# EAGLE board pcb_New (EAGLE 9.6.2)
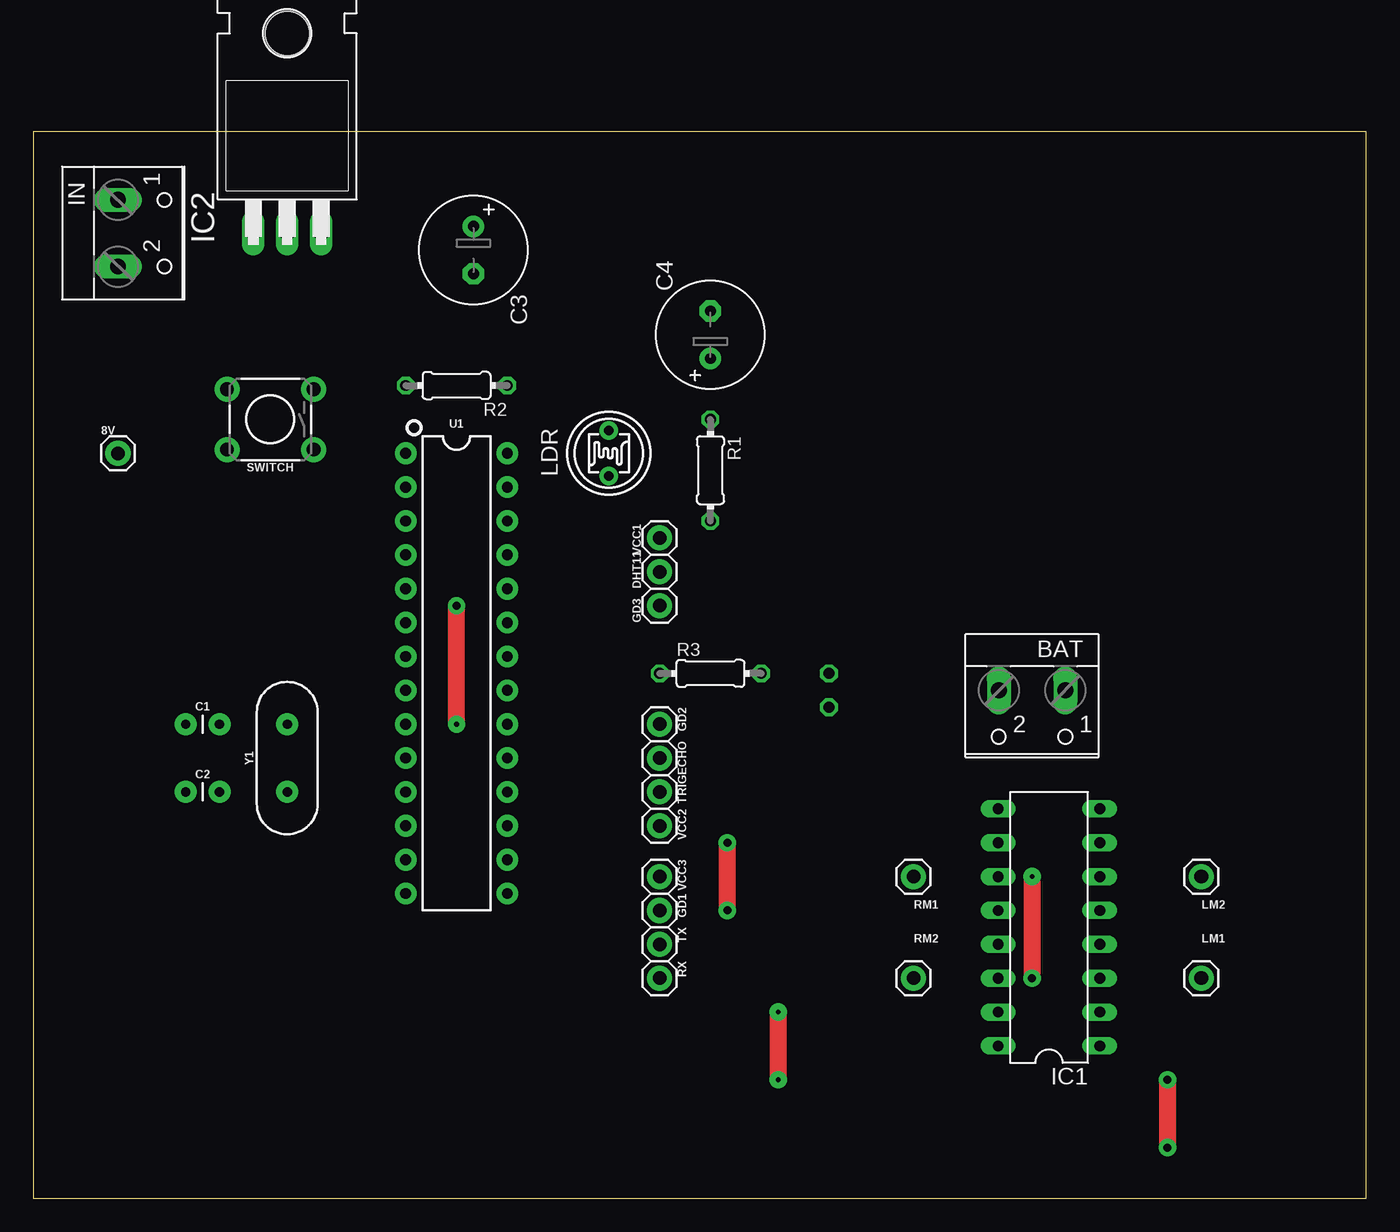
[diagram p0: board, top side]
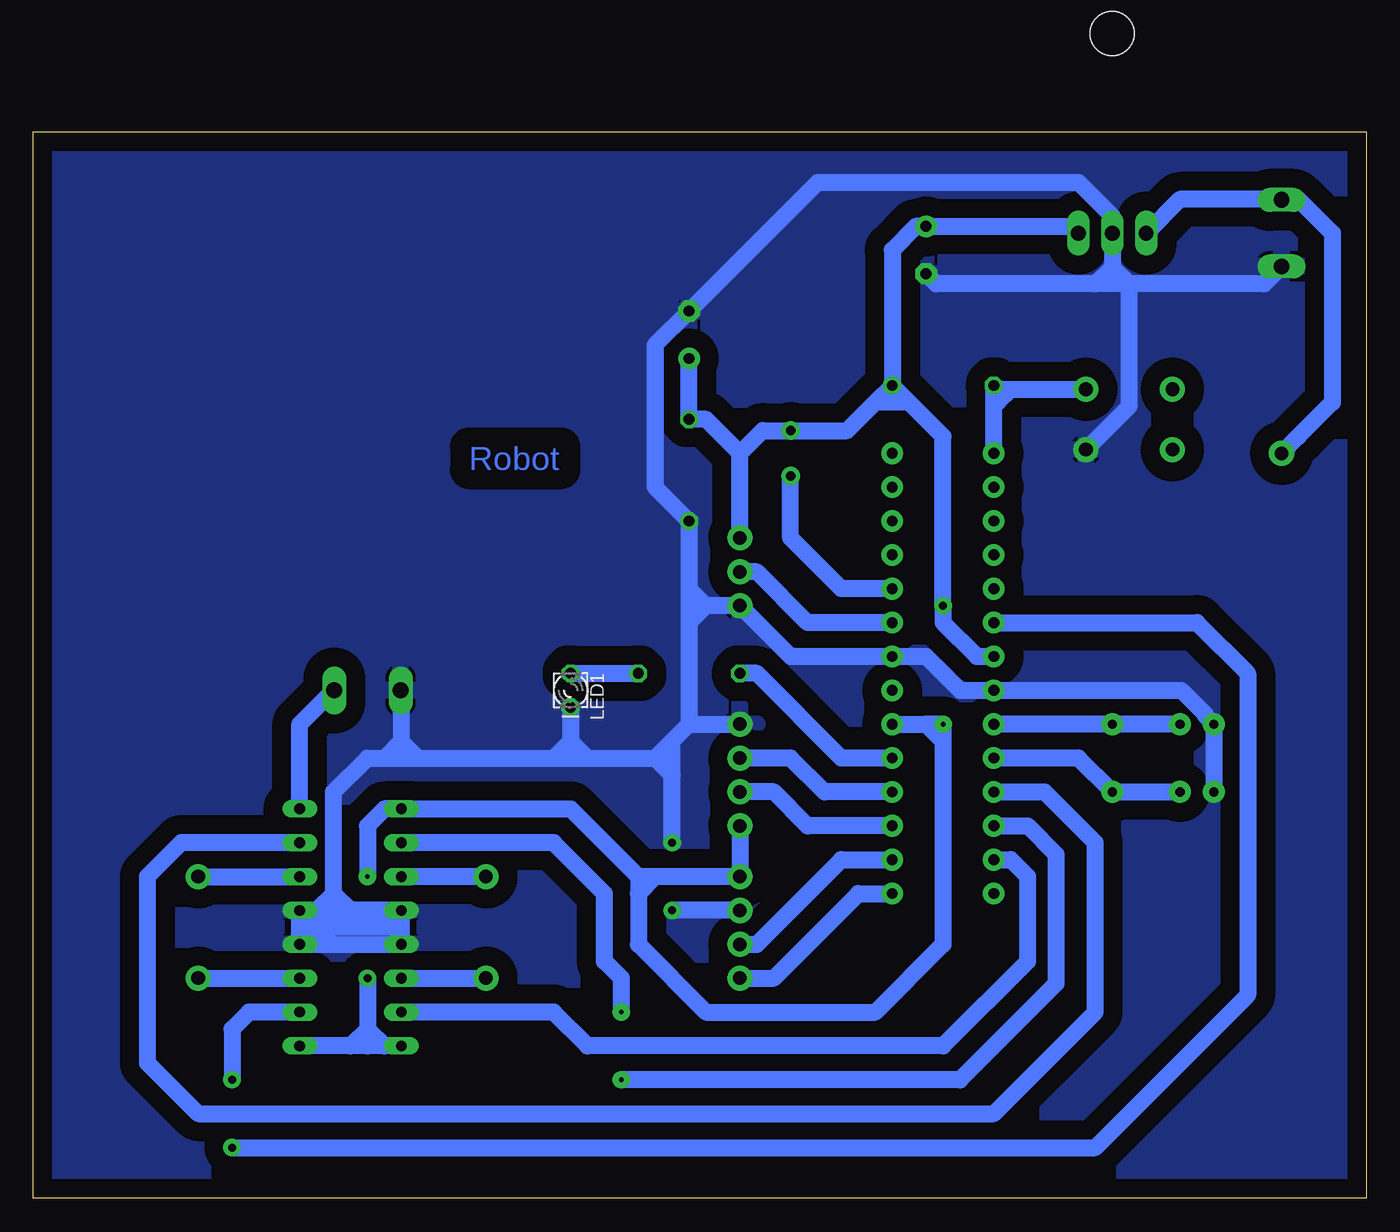
[diagram p1: board, bottom side, seen from below]

Size 100 x 80 mm. Coordinates in mm from the lower left corner, seen from the top.
Outline: 0,0 100,0 100,80 0,80 0,0
Copper layers (1*16): Top 0.035mm / dielectric 0.15mm / Bottom 0.035mm
Design rules "default *": minimum track width 6mil, minimum drill 0.35mm, track to track 16mil, track to pad 16mil, pad to pad 16mil, via to via 16mil, smd to smd 16mil, copper to edge 40mil, drill to drill 6mil, minimum pad ring 10mil, minimum via ring 8mil, stop-mask expansion 4mil, vias tented up to drill 0mil, thermal gap 10mil

## Footprints (pad centres in the part's own frame; a part is rotated, then mirrored left to right if it is on the bottom)
1X01 = drill 1.016 pad 1.88: 1 0,0
W237-102 = drill 1.194 long: 1 -2.5,-1.27; 2 2.5,-1.27
CAP-PTH-2.54 = drill 0.7 pad 1.651: 1 -1.27,0; 2 1.27,0
E3,5-8 = drill 0.813 pad 1.6: + -1.778,0 | drill 0.813 pad 1.6 octagon: - 1.778,0
DIL16 = drill 0.813 long: 1 -8.89,-3.81; 2 -6.35,-3.81; 3 -3.81,-3.81; 4 -1.27,-3.81; 5 1.27,-3.81; 6 3.81,-3.81; 7 6.35,-3.81; 8 8.89,-3.81; 9 8.89,3.81; 10 6.35,3.81; 11 3.81,3.81; 12 1.27,3.81; 13 -1.27,3.81; 14 -3.81,3.81; 15 -6.35,3.81; 16 -8.89,3.81
TO220H = drill 1.118 long: 1 -2.54,-10.16; 2 0,-10.16; 3 2.54,-10.16 | hole 3.302: 0,4.826
T0-46-A10XX = drill 0.7 pad 1.4: 1 -1.7,0; 2 1.7,0
LED_LD260 = drill 0.813 octagon: A -1.27,0; K 1.27,0
0204/7 = drill 0.813 octagon: 1 -3.81,0; 2 3.81,0
TACTILE_SWITCH_PTH_6.0MM = drill 1.016 pad 1.88: 1 -3.251,2.261; 2 3.251,2.261; 3 -3.251,-2.261; 4 3.251,-2.261
DIP28 = drill 0.813 pad 1.626: 1 -16.51,-3.81; 2 -13.97,-3.81; 3 -11.43,-3.81; 4 -8.89,-3.81; 5 -6.35,-3.81; 6 -3.81,-3.81; 7 -1.27,-3.81; 8 1.27,-3.81; 9 3.81,-3.81; 10 6.35,-3.81; 11 8.89,-3.81; 12 11.43,-3.81; 13 13.97,-3.81; 14 16.51,-3.81; 15 16.51,3.81; 16 13.97,3.81; 17 11.43,3.81; 18 8.89,3.81; 19 6.35,3.81; 20 3.81,3.81; 21 1.27,3.81; 22 -1.27,3.81; 23 -3.81,3.81; 24 -6.35,3.81; 25 -8.89,3.81; 26 -11.43,3.81; 27 -13.97,3.81; 28 -16.51,3.81
HC49US = drill 0.7 pad 1.651: 1 -2.54,0; 2 2.54,0

## Placement (x,y rotation side)
8V  8v  [1X01]  6.35,55.88 0 top
BAT  [W237-102]  74.93,36.83 180 top
C1  22pF  [CAP-PTH-2.54]  12.7,35.56 0 top
C2  22pF  [CAP-PTH-2.54]  12.7,30.48 0 top
C3  1000uf  [E3,5-8]  33.02,71.12 270 top
C4  [E3,5-8]  50.8,64.77 90 top
DHT11  DHT11  [1X01]  46.99,46.99 90 top
ECHO  [1X01]  46.99,33.02 270 top
GD1  [1X01]  46.99,21.59 270 top
GD2  [1X01]  46.99,35.56 270 top
GD3  [1X01]  46.99,44.45 90 top
IC1  L293D  [DIL16]  76.2,20.32 90 top
IC2  7805T  [TO220H]  19.05,82.55 0 top
IN  [W237-102]  7.62,72.39 270 top
LDR  A1050_09  [T0-46-A10XX]  43.18,55.88 270 top
LED1  [LED_LD260]  59.69,38.1 270 bottom
LM1  [1X01]  87.63,16.51 0 top
LM2  [1X01]  87.63,24.13 0 top
R1  10k  [0204/7]  50.8,54.61 270 top
R2  10K  [0204/7]  31.75,60.96 180 top
R3  330  [0204/7]  50.8,39.37 0 top
RM1  [1X01]  66.04,24.13 0 top
RM2  [1X01]  66.04,16.51 0 top
RX  [1X01]  46.99,16.51 270 top
SWITCH  Reset  [TACTILE_SWITCH_PTH_6.0MM]  17.78,58.42 180 top
TRIG  [1X01]  46.99,30.48 270 top
TX  [1X01]  46.99,19.05 270 top
U1  328P  [DIP28]  31.75,39.37 270 top
VCC1  [1X01]  46.99,49.53 90 top
VCC2  [1X01]  46.99,27.94 270 top
VCC3  [1X01]  46.99,24.13 270 top
Y1  16MHz  [HC49US]  19.05,33.02 90 top

## Library data of the parts
8V DHT11 ECHO GD1-GD3 LM1 LM2 RM1 RM2 RX TRIG TX VCC1-VCC3 = SparkFun-Connectors
BAT IN = con-wago-500; MPN: 237-102; OC_FARNELL: unknown; OC_NEWARK: 70K9898
C1 C2 = SparkFun-Capacitors; PROD_ID: CAP-09128
C3 C4 = BeagleBone_Blue_R3
IC1 = st-microelectronics; MPN: L293D; OC_FARNELL: 9589619; OC_NEWARK: 56P8249
IC2 = linear
LDR = photo-elements
LED1 = eagle-ltspice; SPICEMODEL: NONE; SPICEPREFIX: D; SPICETYPE: diode
R1-R3 = rcl; SPICEPREFIX: R
SWITCH = SparkFun-Switches; PROD_ID: SWCH-08441; SF_SKU: COM-00097
U1 = SparkFun-IC-Microcontroller; PROD_ID: IC-09136
Y1 = SparkFun-Clocks; PROD_ID: XTAL-08181; SF_ID: COM-00536

## Nets
GND: BAT.2 C1.1 C2.1 C3.- C4.- GD1.1 GD2.1 GD3.1 IC1.4 IC1.5 IC1.12 IC1.13 IC2.2 IN.2 LED1.K R1.2 SWITCH.1 U1.8 U1.22
N$1: C1.2 U1.9 Y1.2
N$2: C2.2 U1.10 Y1.1
N$3: RX.1 U1.15
N$4: R2.2 SWITCH.3 U1.1
N$5: TX.1 U1.16
N$6: ECHO.1 U1.18
N$7: TRIG.1 U1.17
N$8: LDR.2 U1.24
N$9: DHT11.1 U1.23
N$10: LED1.A R3.2
N$11: R3.1 U1.19
N$12: IC1.2 U1.6
N$13: BAT.1 IC1.8
N$14: IC1.6 LM2.1
N$15: 8V.1 IC2.1 IN.1
N$16: IC1.3 LM1.1
N$17: IC1.14 RM2.1
N$18: IC1.7 U1.11
N$19: IC1.11 RM1.1
N$21: IC1.10 U1.12
N$23: IC1.15 U1.13
VCC: C3.+ C4.+ IC1.1 IC1.9 IC1.16 IC2.3 LDR.1 R1.1 R2.1 U1.7 U1.20 VCC1.1 VCC2.1 VCC3.1

## Tracks (layer width: path | path; a pad name or v marks a point on that pad's centre or on a via)
GND  (via drill 0.35, 0.6, 0.6 pad 1.3)
  Top 1.27: v52.07,21.59 v52.07,26.67
  Bottom 1.27: IN.2 7.66,68.58 17.78,68.58 | 19.05,69.85 17.78,68.58 | 19.05,69.85 IC2.2 19.05,73.66 21.59,76.2 41.15,76.2 C4.- 53.34,64.01 53.34,53.34 R1.2 50.8,45.72 | C3.- 32.26,68.58 20.32,68.58 | 20.32,68.58 19.05,69.85 | 17.78,68.58 20.32,68.58 | SWITCH.1 17.78,59.41 17.78,68.58 | C2.1 C1.1 12.1,36.23 12.1,36.33 13.87,38.1 U1.8 30.48,38.1 33.02,40.64 U1.22 43.18,40.64 GD3.1 49.53,44.45 | 80.01,20.32 IC1.5 | 80.01,20.32 78.74,20.32 | 78.74,20.32 77.47,20.32 | 80.01,20.32 IC1.4 IC1.13 72.39,20.32 | 49.53,44.45 50.8,45.72 | 49.53,44.45 50.8,43.18 | 72.39,38.1 BAT.2 72.39,38.06 72.39,34.29 | 72.39,20.32 IC1.12 76.2,21.59 | GD1.1 v52.07,21.59 | v52.07,26.67 52.07,31.75 | 52.07,31.75 52.07,34.29 | 52.07,34.29 50.8,35.56 | 50.8,35.56 GD2.1 | IC1.5 78.74,21.59 | 77.47,22.86 77.47,30.48 74.93,33.02 73.66,33.02 | 52.07,34.29 53.34,33.02 | 73.66,33.02 72.39,33.02 | 72.39,33.02 71.12,33.02 | 71.12,33.02 60.96,33.02 | 60.96,33.02 59.69,33.02 | 59.69,33.02 58.42,33.02 | 58.42,33.02 53.34,33.02 | 50.8,43.18 50.8,35.56 | LED1.K 59.69,34.29 | 59.69,34.29 59.69,33.02 | 72.39,34.29 72.39,33.02 | 52.07,31.75 53.34,33.02 | 77.47,20.32 77.47,22.86 | 77.47,22.86 78.74,21.59 | 78.74,21.59 78.74,20.32 | 76.2,21.59 IC1.5 | 72.39,20.32 77.47,20.32 | 77.47,22.86 76.2,21.59 | 72.39,34.29 71.12,33.02 | 72.39,34.29 73.66,33.02 | 59.69,34.29 58.42,33.02 | 59.69,34.29 60.96,33.02 | 50.8,45.72 50.8,43.18
  other vias: 46.99,21.59
  pour Bottom (isolate 1.422): 0,80.01 100.33,80.01 100.33,0 0,0
N$1
  Bottom 1.27: U1.9 Y1.2 C1.2
N$2
  Bottom 1.27: U1.10 21.59,33.02 Y1.1 C2.2
N$3
  Bottom 1.27: RX.1 44.45,16.51 38.1,22.86 U1.15
N$4
  Bottom 1.27: 26.67,60.68 27.66,60.68 R2.2 27.94,59.69 | 26.67,60.68 SWITCH.3 | U1.1 27.94,59.69 | 27.94,59.69 27.66,59.69 26.67,60.68
N$5
  Bottom 1.27: TX.1 45.72,19.05 39.37,25.4 U1.16
N$6
  Bottom 1.27: ECHO.1 43.18,33.02 40.64,30.48 U1.18
N$7
  Bottom 1.27: TRIG.1 44.45,30.48 41.91,27.94 U1.17
N$8
  Bottom 1.27: U1.24 39.37,45.72 43.18,49.53 LDR.2
N$9
  Bottom 1.27: U1.23 41.91,43.18 45.72,46.99 DHT11.1
N$10
  Bottom 1.27: LED1.A R3.2
N$11
  Bottom 1.27: R3.1 45.72,39.37 39.37,33.02 U1.19
N$12  (via drill 0.35 pad 1.3, 0.6 pad 1.3)
  Top 1.27: v85.09,8.89 v85.09,3.81
  Bottom 1.27: U1.6 12.7,43.18 8.89,39.37 8.89,15.24 20.32,3.81 v85.09,3.81 | IC1.2 83.82,13.97 85.09,12.7 v85.09,8.89
N$13
  Bottom 1.27: IC1.8 80.01,35.56 77.43,38.14 BAT.1
N$14
  Bottom 1.27: LM2.1 IC1.6
N$15
  Bottom 1.27: IC2.1 13.97,74.93 6.39,74.93 IN.1 5.04,74.89 2.54,72.39 2.54,59.69 5.08,57.15 8V.1
N$16
  Bottom 1.27: LM1.1 IC1.3
N$17
  Bottom 1.27: IC1.14 RM2.1
N$18
  Bottom 1.27: U1.11 24.13,30.48 20.32,26.67 20.32,13.97 27.94,6.35 87.63,6.35 91.44,10.16 91.44,24.13 88.9,26.67 IC1.7
N$19
  Bottom 1.27: RM1.1 IC1.11
N$21  (via drill 0.35 pad 1.3)
  Top 1.27: v55.88,13.97 v55.88,8.89
  Bottom 1.27: U1.12 25.4,27.94 23.27,25.81 23.27,16.1 30.48,8.89 v55.88,8.89 | IC1.10 60.96,26.67 57.15,22.86 57.15,17.78 55.88,16.51 v55.88,13.97
N$23
  Bottom 1.27: U1.13 26.67,25.4 25.4,24.13 25.4,17.78 31.75,11.43 58.42,11.43 60.96,13.97 IC1.15
VCC  (via drill 0.35 pad 1.3, 0.6 pad 1.3)
  Top 1.27: v74.93,24.13 v74.93,16.51 | v31.75,35.56 v31.75,44.45
  Bottom 1.27: IC2.3 22.1,72.9 C3.+ 33.78,72.9 35.56,71.12 R2.1 | IC1.16 73.66,11.43 | 73.66,11.43 74.93,11.43 | 74.93,11.43 76.2,11.43 | 76.2,11.43 IC1.1 | v74.93,24.13 74.93,27.94 73.66,29.21 IC1.9 59.69,29.21 54.61,24.13 | v74.93,16.51 74.93,12.7 | 74.93,11.43 74.93,12.7 | U1.20 33.02,35.56 | 34.29,59.69 31.75,57.15 v31.75,44.45 31.75,43.18 29.21,40.64 U1.7 | 34.29,59.69 R2.1 | 31.75,34.29 31.75,19.05 36.83,13.97 49.53,13.97 54.61,19.05 54.61,22.86 | VCC2.1 VCC3.1 53.34,24.13 | 53.34,24.13 54.61,24.13 | C4.+ R1.1 49.53,58.42 46.99,55.88 | VCC1.1 46.99,55.88 | 46.99,55.88 45.29,57.58 LDR.1 38.94,57.58 36.83,59.69 | 36.83,59.69 R2.1 | 54.61,24.13 54.61,22.86 | 53.34,24.13 54.61,22.86 | 74.93,12.7 73.66,11.43 | 74.93,12.7 76.2,11.43 | 34.29,59.69 36.83,59.69 | 33.02,35.56 31.75,34.29 | 31.75,34.29 v31.75,35.56 33.02,35.56

## Text on the board
Bottom: Robot